# Allegro board OSCILLATOR.brd
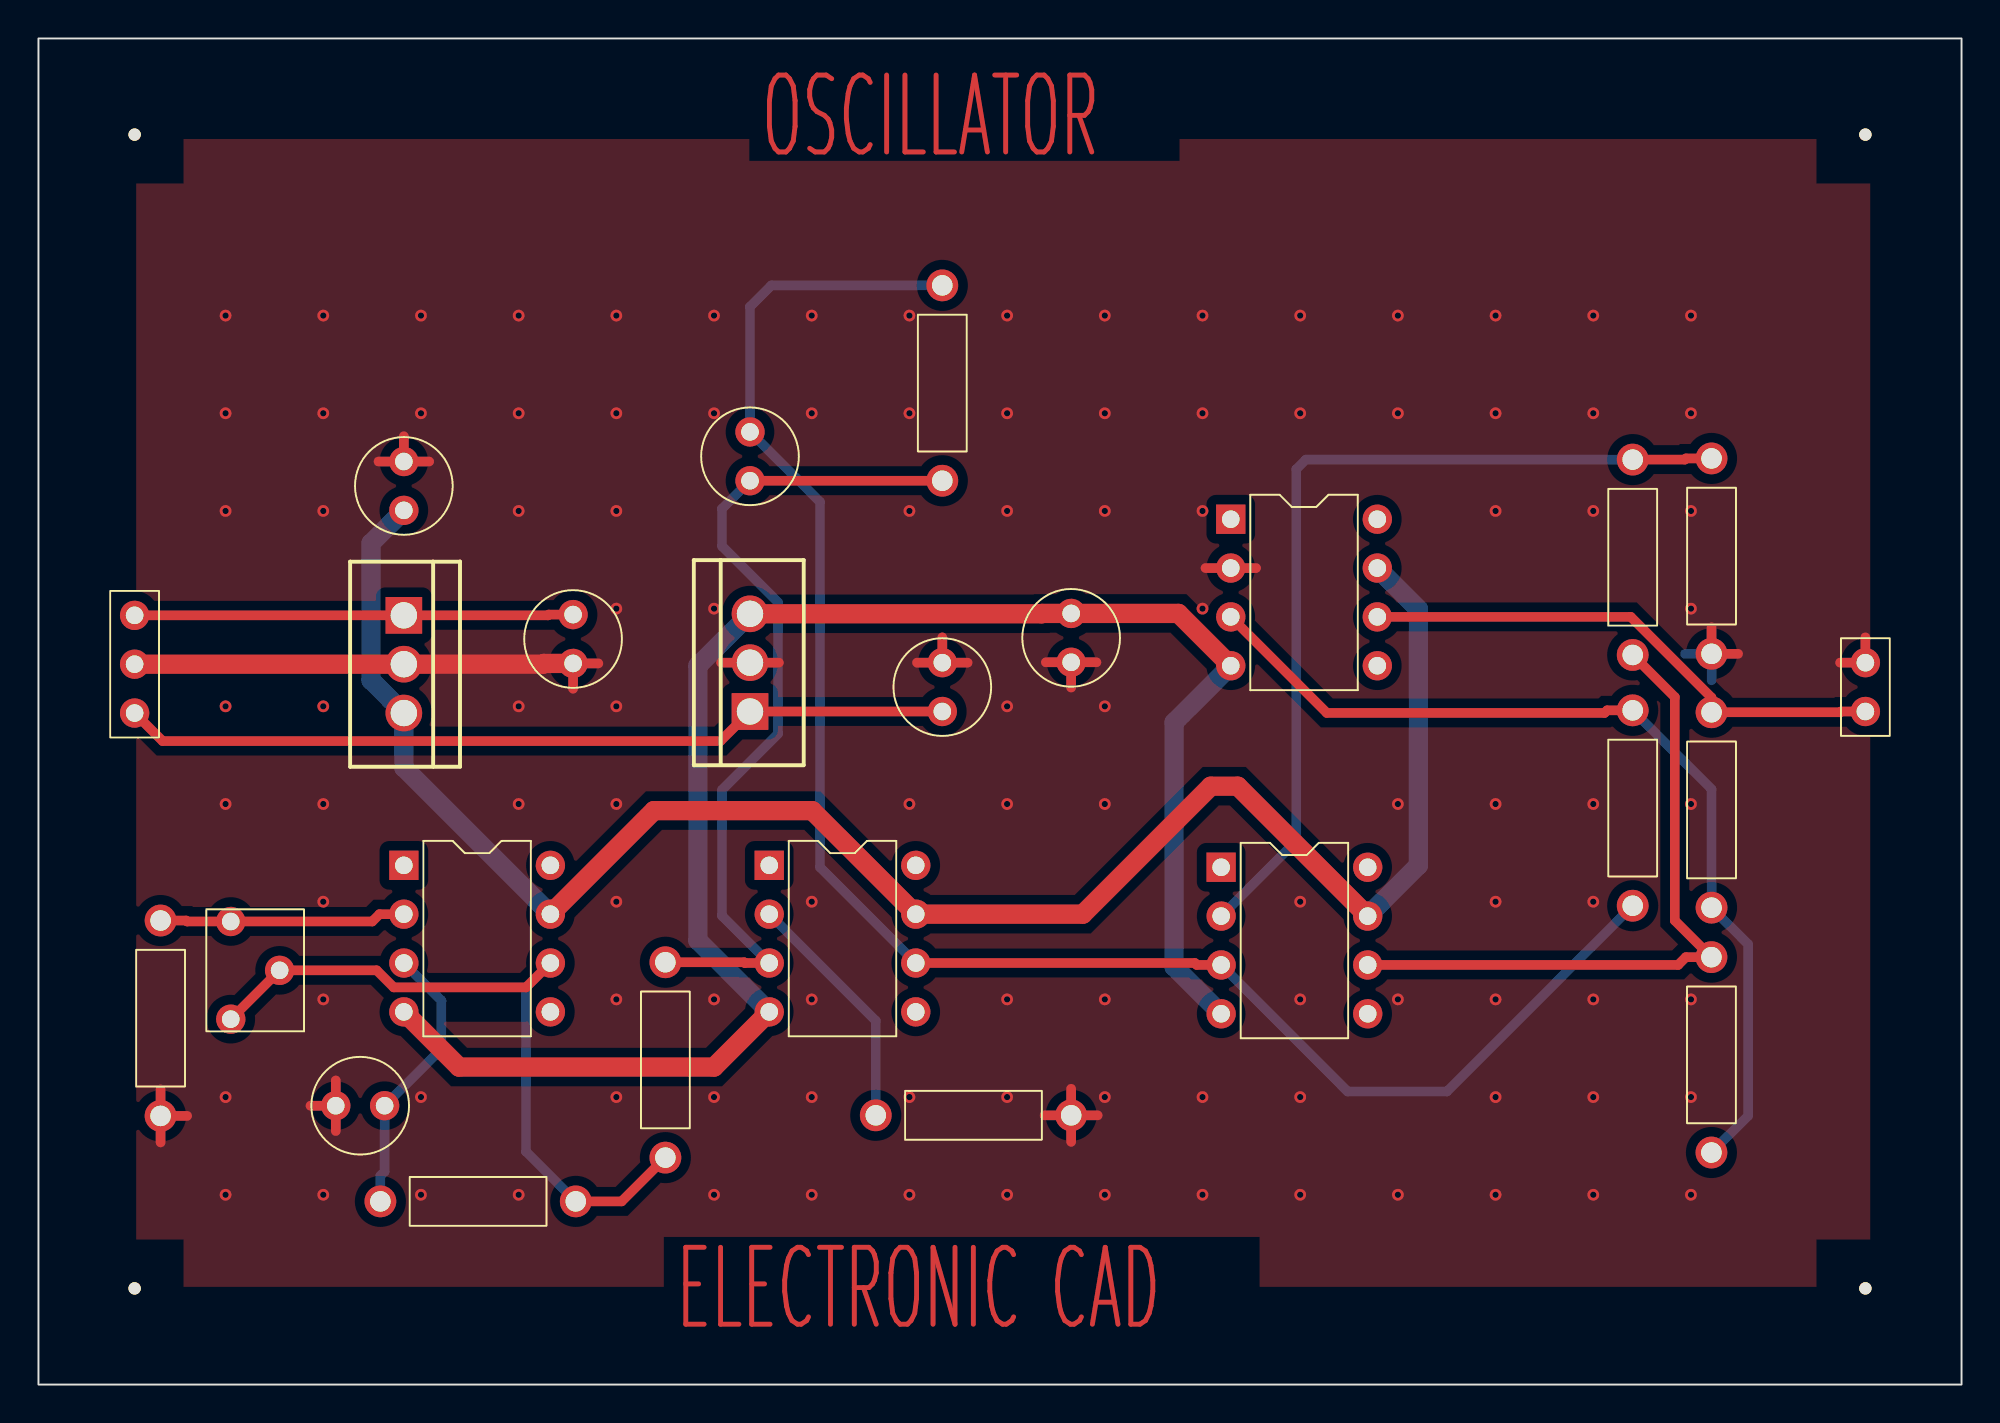
[diagram p0: board, top side]
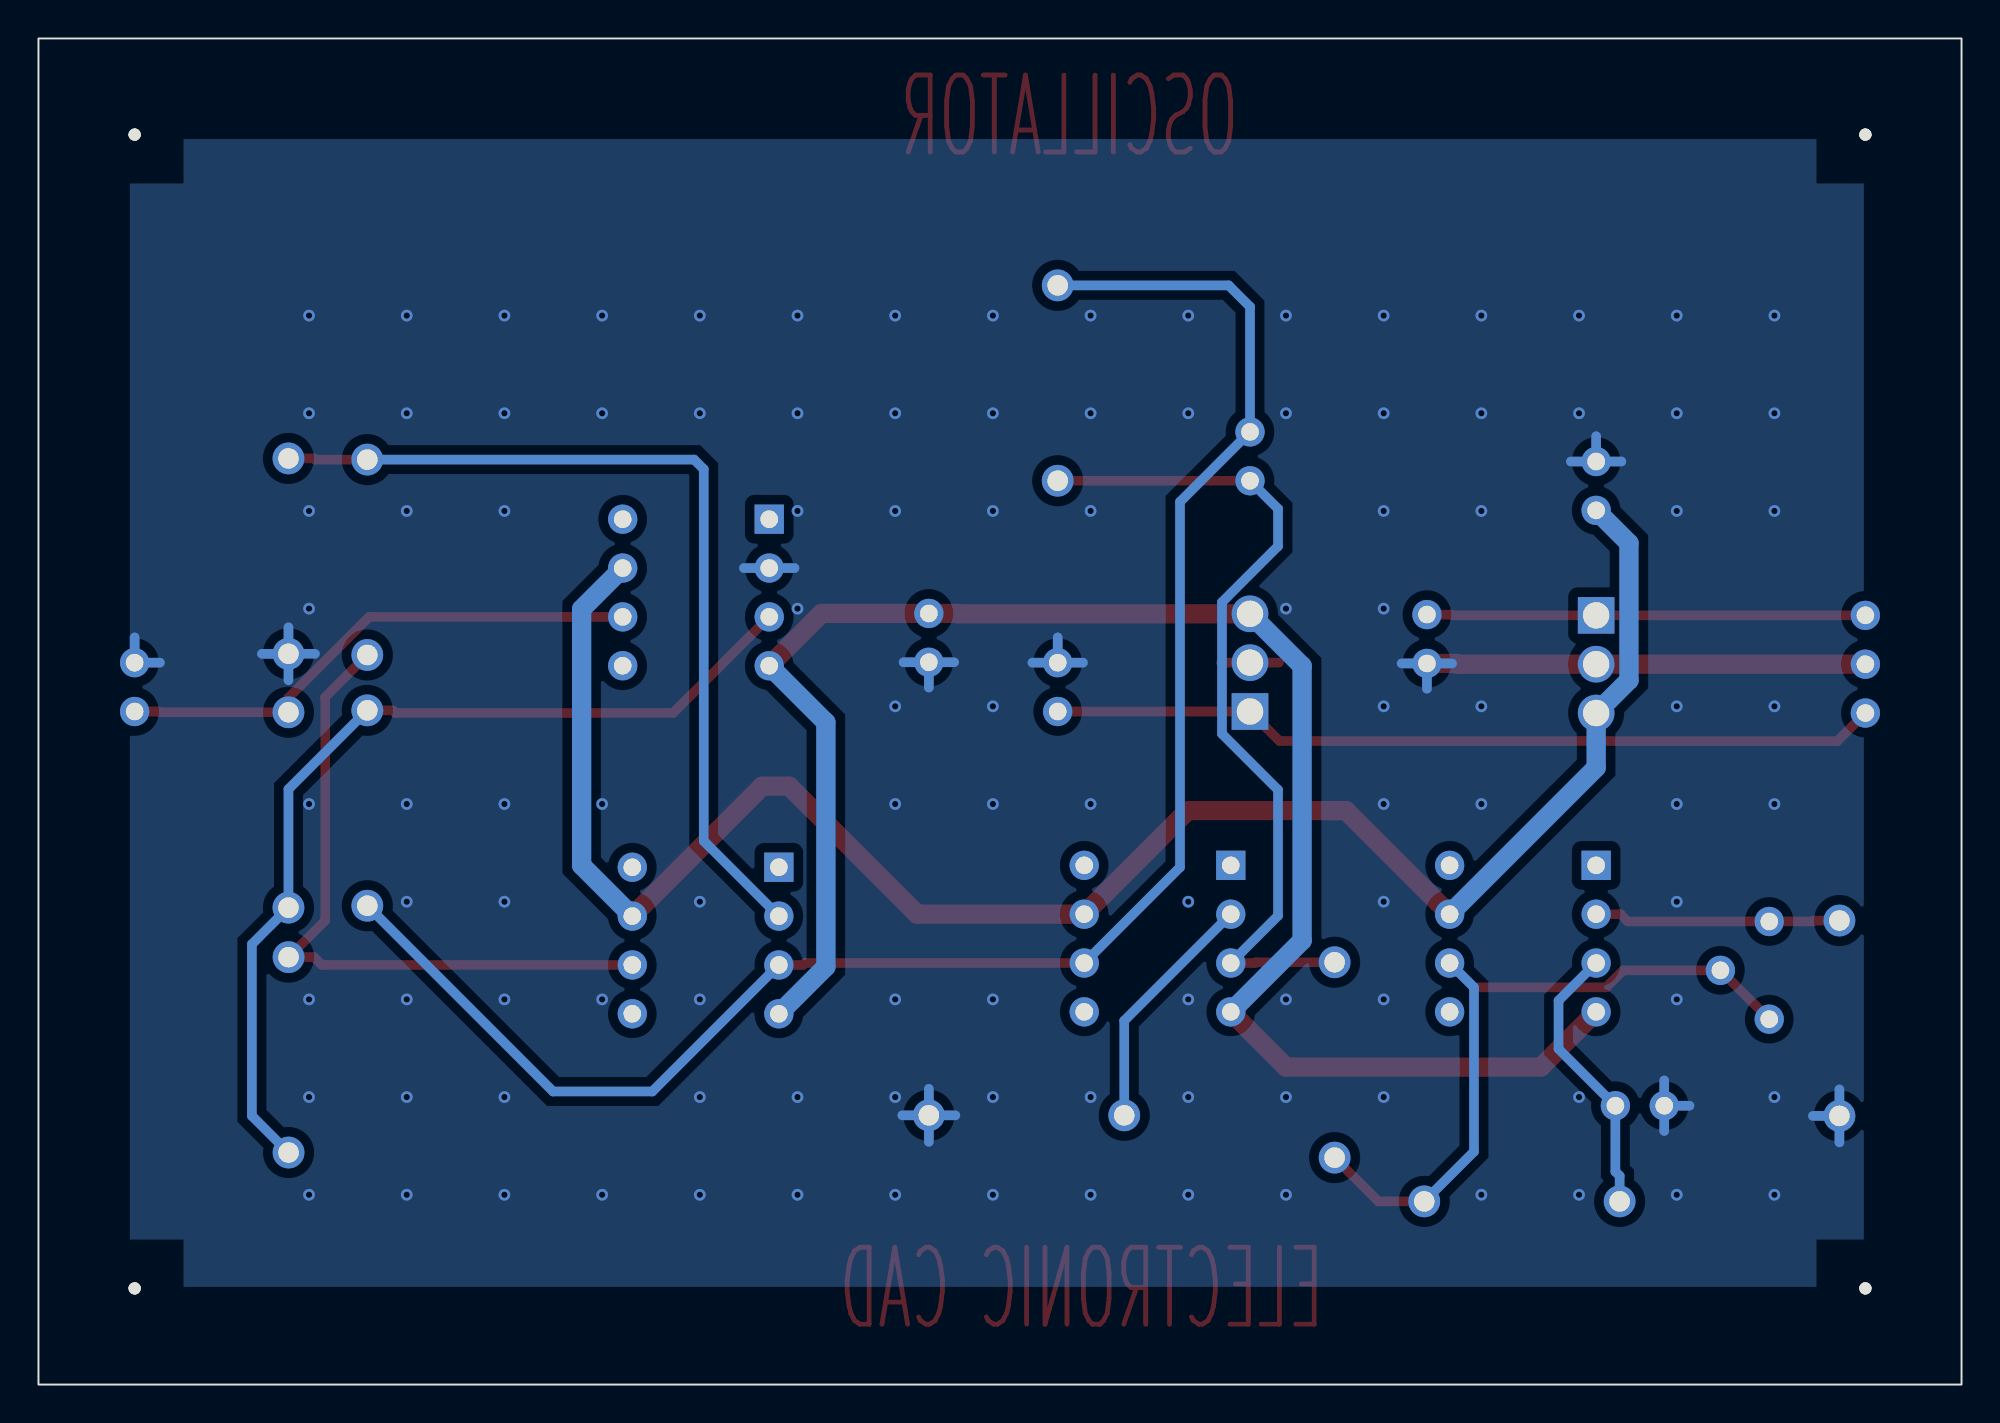
[diagram p1: board, bottom side, seen from below]

Outline 100 x 70 mm; copper layers: TOP, BOTTOM. Coordinates in mm from the lower left corner of the outline.
Outline path: rectangle 0,0 100,70

## Design rules (mm)
nets with their own width: min track width 0.5; nets N00162 N00166 N00258 N00510 N00514 N00728 N00745 N00770 N01531 N01677 OUT SIG
nets with their own width: min track width 1; nets +VCC -VCC GND

## Placement (name value [footprint] x y rotation side)
C1  0.001uF  [CAP196]  37 47 0 top
C2  270pF  [CAP196]  18 14.5 90 top
C3  0.1uF  [CAP196]  27.8 37.5 0 top
C4  0.1uF  [CAP196]  19 48 180 top
C5  0.1uF  [CAP196]  47 35 0 top
C6  0.1uF  [CAP196]  53.7 40.1 180 top
J1  CON2  [JUMPER2]  95 35 90 top
J2  CON3  [JUMPER3]  5 40 270 top
NOREF  -  [unnamed]  95 5 0 top
NOREF#2  -  [unnamed]  95 65 0 top
NOREF#3  -  [unnamed]  5 65 0 top
NOREF#4  -  [#2]  100 0 90 top
NOREF#5  -  [#2]  0 70 0 top
NOREF#6  -  [unnamed]  5 5 0 top
R1  10k  [RES400]  17.78 9.53 270 top
R2  100k  [RES400]  47 47 0 top
R3  10k  [RES400]  82.9 24.9 0 top
R4  10k  [RES400]  87 24.8 0 top
R5  62k  [RES400]  32.6 11.8 0 top
R6  10k  [RES400]  53.7 14 90 top
R7  10k  [RES400]  87 22.23 180 top
R8  10k  [RES400]  6.35 13.97 0 top
R9  10k  [RES400]  82.9 48.1 180 top
R10  10k  [RES400]  87 38 0 top
U1  LF351  [DIP8_3]  19 27 0 top
U2  LF351  [DIP8_3]  38 27 0 top
U3  LF351  [DIP8_3]  61.5 26.9 0 top
U4  LF351  [DIP8_3]  62 45 0 top
U5  LM7812/TO  [TO220AB]  19 40 270 top
U6  LM7912C/TO220  [TO220AB]  37 35 90 top
VR1  1M  [RESADJ]  10 19 180 top

## Library data of the parts
C1-C6 = CAP NP: Tolerance: ***; User Part Number: ***
J1 = CON2: User Part Number: ***
J2 = CON3: User Part Number: ***
R1-R10 = R: Tolerance: ***; User Part Number: ***
U1-U4 = LF351_0: Tolerance: ***; User Part Number: ***
U5 = LM7812/TO_8
U6 = LM7912C/TO220_2
VR1 = POT: Tolerance: ***; User Part Number: ***

## Footprints (pads in the part's own frame, mm; a bottom-side part is the same pattern mirrored in y, then rotated)
CAP196
  round 1.524 hole 0.914: 1(0,0) 2(0,2.54)
DIP8_3
  rect 1.524x1.524 hole 0.914: 1(0,0)
  round 1.524 hole 0.914: 2(0,-2.54) 3(0,-5.08) 4(0,-7.62) 5(7.62,-7.62) 6(7.62,-5.08) 7(7.62,-2.54) 8(7.62,0)
JUMPER2
  round 1.524 hole 0.914: 1(0,0) 2(2.54,0)
JUMPER3
  round 1.524 hole 0.914: 1(0,0) 2(2.54,0) 3(5.08,0)
RES400
  round 1.651 hole 1.067: 1(0,0) 2(0,10.16)
RESADJ
  round 1.524 hole 0.914: 1(0,0) 2(-2.54,-2.54) 3(0,-5.08)
TO220AB
  rect 1.905x1.905 hole 1.372: 1(0,0)
  round 1.905 hole 1.372: 2(2.54,0) 3(5.08,0)
unnamed
  round 0.635 hole 3.175 unplated: (0,0)

## Nets
+VCC: C4.2 U1.7 U2.7 U3.7 U4.7 U5.3(VOUT)
-VCC: C6.1 U1.4(V-) U2.4(V-) U3.4(V-) U4.4(V-) U6.3(VOUT)
GND: C2.2 C3.1 C4.1 C5.2 C6.2 J1.2 J2.2 R6.1 R8.1 R10.1 U4.2 U5.2 U6.2
OUT: J1.1 R4.2 U4.6
SIG: C1.2 R2.2 R3.1 U2.6 U3.3
N00162: R1.2 R5.1 U1.6 VR1.1 VR1.2(WIPER)
N00166: C2.1 R1.1 U1.3
N00258: R8.2 U1.2 VR1.3
N00510: C1.1 R2.1 R5.2 U2.3
N00514: R6.2 U2.2
N00728: R7.1 R9.2 U3.6
N00745: R3.2 R4.1 R7.2 U4.3
N00770: R9.1 R10.2 U3.2
N01531: C3.2 J2.1 U5.1
N01677: C5.1 J2.3 U6.1

Pads without a net: U1 1 5 8; U2 1 5 8; U3 1 5 8; U4 1 5 8

## Via types
v1: diameter 0.61, hole 0.33, TOP to BOTTOM, 109 vias

## Routing (per net, layer and track width the routed paths; a pad name or vN(x,y) marks a point on that pad's centre or on a via; arc(x,y) is an arc through that point)
+VCC: length 98.2
  TOP w1: U3.7 62.37,31.11 60.96,31.11 54.3,24.46 U2.7 40.23,29.84 32.01,29.84 U1.7
  BOTTOM w1: C4.2 17.29,43.75 17.29,36.63 U5.3 19,32.08 U1.7 ; U3.7 71.75,27 71.75,40.33 U4.7
-VCC: length 91.2
  TOP w1: U6.3 52.16,40.08 52.18,40.1 C6.1 59.28,40.1 U4.4 ; U1.4 21.87,16.51 35.13,16.51 U2.4
  BOTTOM w1: U2.4 34.29,23.09 34.29,37.37 U6.3 ; U4.4 59.05,34.44 59.05,21.73 U3.4
GND: length 102.1
  TOP w0.5: 88.38,38 R10.1 87,39.38 ; R6.1 55.08,14 ; R6.1 52.32,14 ; R6.1 53.7,15.38 ; R6.1 53.7,12.62 ; 35.49,37.54 U6.2 38.51,37.54 ; 60.69,42.46 U4.2 63.31,42.46 ; C4.1 19,49.31 ; C4.1 17.68,48 ; C4.1 20.32,48 ; 93.69,37.54 J1.2 95,38.85 ; 45.69,37.54 C5.2 ; C5.2 48.31,37.54 ; C5.2 47,38.85 ; R8.1 6.35,15.35 ; R8.1 7.73,13.97 ; R8.1 6.35,12.59 ; C6.2 55.02,37.56 ; C6.2 53.7,36.24 ; C6.2 52.38,37.56 ; 15.46,13.19 C2.2 ; C2.2 14.14,14.5 ; C2.2 15.46,15.81 ; 29.11,37.5 C3.1 27.8,36.19
  TOP w1: J2.2 U5.2 26.24,37.46 26.28,37.5 C3.1
  BOTTOM w0.5: 17.68,48 C4.1 ; C4.1 19,49.31 ; C4.1 20.32,48 ; 26.48,37.5 C3.1 ; C3.1 29.11,37.5 ; C3.1 27.8,36.19 ; 53.7,12.62 R6.1 ; R6.1 53.7,15.38 ; R6.1 55.08,14 ; R6.1 52.32,14 ; 53.7,36.24 C6.2 ; C6.2 52.38,37.56 ; C6.2 55.02,37.56 ; 87,36.62 R10.1 ; R10.1 85.62,38 ; R10.1 88.38,38 ; R10.1 87,39.38 ; 93.69,37.54 J1.2 95,38.85 ; C5.2 48.31,37.54 ; C5.2 47,38.85 ; C5.2 45.69,37.54 ; C2.2 15.46,15.81 ; C2.2 14.14,14.5 ; C2.2 15.46,13.19 ; R8.1 6.35,15.35 ; R8.1 6.35,12.59 ; R8.1 7.73,13.97 ; 63.31,42.46 U4.2 60.69,42.46
  vias: v1(9.73,55.59) v1(9.73,50.51) v1(9.73,45.43) v1(9.73,35.27) v1(9.73,30.19) v1(9.73,14.95) v1(9.73,9.87) v1(14.81,55.59) v1(14.81,50.51) v1(14.81,45.43) v1(14.81,35.27) v1(14.81,30.19) v1(14.81,25.11) v1(14.81,20.03) v1(14.81,9.87) v1(19.89,55.59) v1(19.89,50.51) v1(19.89,14.95) v1(19.89,9.87) v1(24.97,55.59) v1(24.97,50.51) v1(24.97,45.43) v1(24.97,35.27) v1(24.97,30.19) v1(24.97,9.87) v1(30.05,55.59) v1(30.05,50.51) v1(30.05,45.43) v1(30.05,40.35) v1(30.05,35.27) v1(30.05,30.19) v1(30.05,25.11) v1(30.05,20.03) v1(30.05,14.95) v1(35.13,55.59) v1(35.13,50.51) v1(35.13,40.35) v1(35.13,20.03) v1(35.13,14.95) v1(35.13,9.87) v1(40.21,55.59) v1(40.21,50.51) v1(40.21,25.11) v1(40.21,20.03) v1(40.21,14.95) v1(40.21,9.87) v1(45.29,55.59) v1(45.29,50.51) v1(45.29,45.43) v1(45.29,30.19) v1(45.29,14.95) v1(45.29,9.87) v1(50.37,55.59) v1(50.37,50.51) v1(50.37,45.43) v1(50.37,35.27) v1(50.37,30.19) v1(50.37,20.03) v1(50.37,14.95) v1(50.37,9.87) v1(55.45,55.59) v1(55.45,50.51) v1(55.45,45.43) v1(55.45,35.27) v1(55.45,30.19) v1(55.45,20.03) v1(55.45,14.95) v1(55.45,9.87) v1(60.53,55.59) v1(60.53,50.51) v1(60.53,45.43) v1(60.53,40.35) v1(60.53,14.95) v1(60.53,9.87) v1(65.61,55.59) v1(65.61,50.51) v1(65.61,25.11) v1(65.61,20.03) v1(65.61,14.95) v1(65.61,9.87) v1(70.69,55.59) v1(70.69,50.51) v1(70.69,30.19) v1(70.69,20.03) v1(70.69,9.87) v1(75.77,55.59) v1(75.77,50.51) v1(75.77,45.43) v1(75.77,30.19) v1(75.77,25.11) v1(75.77,20.03) v1(75.77,14.95) v1(75.77,9.87) v1(80.85,55.59) v1(80.85,50.51) v1(80.85,45.43) v1(80.85,30.19) v1(80.85,25.11) v1(80.85,20.03) v1(80.85,14.95) v1(80.85,9.87) v1(85.93,55.59) v1(85.93,50.51) v1(85.93,45.43) v1(85.93,40.35) v1(85.93,30.19) v1(85.93,20.03) v1(85.93,14.95) v1(85.93,9.87)
OUT: length 27.9
  TOP w0.5: U4.6 82.8,39.92 87,35.72 R4.2 93.69,34.96 93.73,35 J1.1
SIG: length 92.2
  TOP w0.5: U2.6 60.13,21.92 60.23,21.82 U3.3
  BOTTOM w0.5: R2.2 38.11,57.16 37,56.05 C1.2 40.64,45.9 40.64,26.9 U2.6 ; U3.3 68.08,15.24 73.24,15.24 R3.1
N00162: length 38.2
  TOP w0.5: VR1.1 VR1.2 17.59,21.54 18.48,20.65 25.35,20.65 U1.6 ; R5.1 30.32,9.53 R1.2
  BOTTOM w0.5: R1.2 25.35,12.11 25.35,20.65 U1.6
N00166: length 14.5
  BOTTOM w0.5: U1.3 20.95,19.96 20.95,17.45 C2.1 18,11.07 17.78,10.86 R1.1
N00258: length 12.8
  TOP w0.5: R8.2 7.68,24.13 7.73,24.08 VR1.3 17.35,24.08 17.73,24.46 U1.2
N00510: length 44.5
  TOP w0.5: U2.3 36.73,21.92 36.69,21.96 R5.2 ; C1.1 R2.1
  BOTTOM w0.5: C1.1 35.54,45.54 35.54,43.6 38.46,40.68 38.46,33.84 35.54,30.93 35.54,24.38 U2.3
N00514: length 12.8
  BOTTOM w0.5: U2.2 43.54,18.92 R6.2
N00728: length 35.5
  TOP w0.5: R9.2 85.09,35.75 85.09,24.13 R7.1 85.67,22.23 85.26,21.82 U3.6
N00745: length 49.3
  TOP w0.5: U4.3 67,34.92 81.44,34.92 81.57,35.06 R3.2
  BOTTOM w0.5: 87,12.06 88.9,13.97 88.9,22.9 R4.1 87,30.96 R3.2
N00770: length 46.7
  TOP w0.5: R9.1 85.61,48.1 85.67,48.16 R10.2
  BOTTOM w0.5: U3.2 65.41,28.27 65.41,47.6 65.91,48.1 R9.1
N01531: length 22.8
  TOP w0.5: C3.2 26.53,40.04 26.49,40 U5.1 J2.1
N01677: length 43.2
  TOP w0.5: C5.1 U6.1 35.46,33.46 6.46,33.46 J2.3

## Copper pours and planes (outline as drawn; the poured copper is in the pictures)
GND on TOP: 5.08,5.08 5.08,64.77 95.25,64.77 95.25,5.08 ; 2 cut-outs
GND on BOTTOM: 95.25,5.08 95.25,64.77 5.08,64.77 5.08,5.08 ; 3 cut-outs

## Text on the board
TOP: ELECTRONIC CAD | OSCILLATOR
DIMENSION: FIGURE | FINISHED_SIZE | 0.914 | 1.067 | 1.372 | 3.175 | DRILL CHART: TOP to BOTTOM | ALL UNITS ARE IN MILLIMETERS | PLATED | NON-PLATED | QTY | 52 | 20 | 6 | 4
